# Altium PCB NANORACK_LASER_EXT..PcbDoc
Units mm, origin at the board's own origin, x right, y up, seen from the top; angles counter-clockwise.
Board outline 35.5 x 54.5 mm, 2 copper layers (Top Layer, Bottom Layer); 39 components, 23 nets, 235 pads, 95 vias.
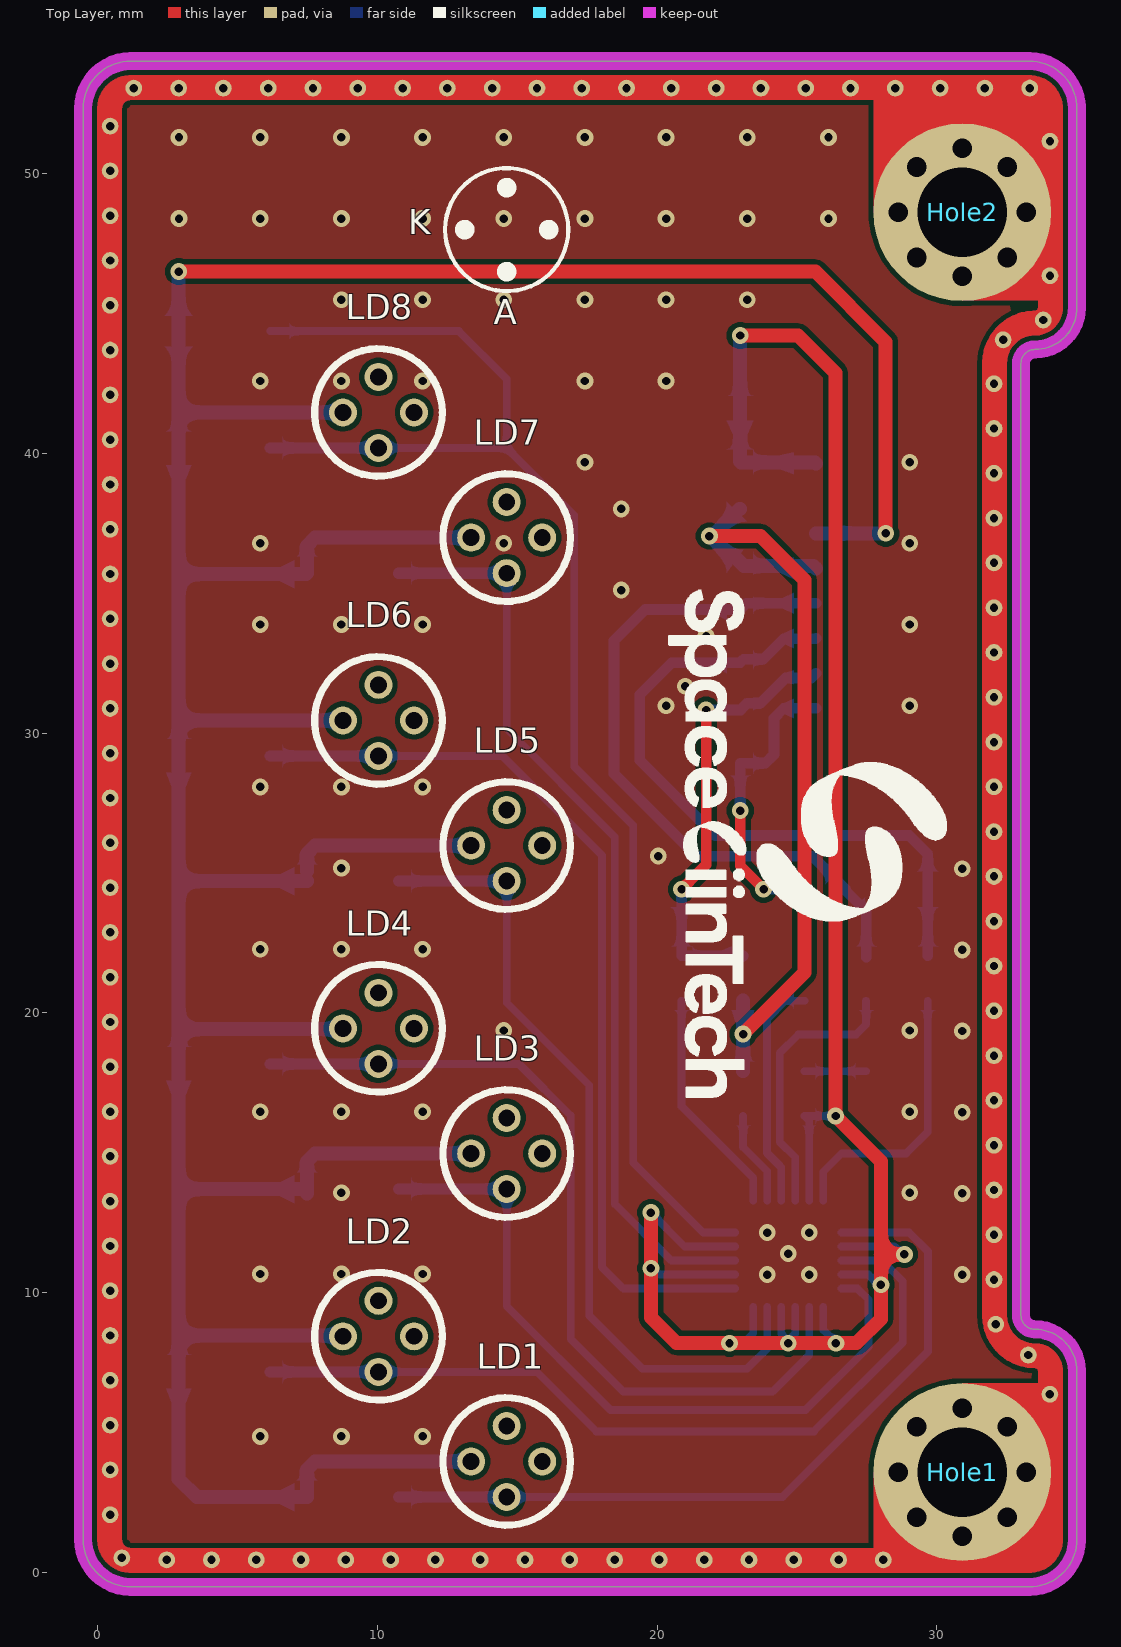
[diagram p0: Top Layer view]
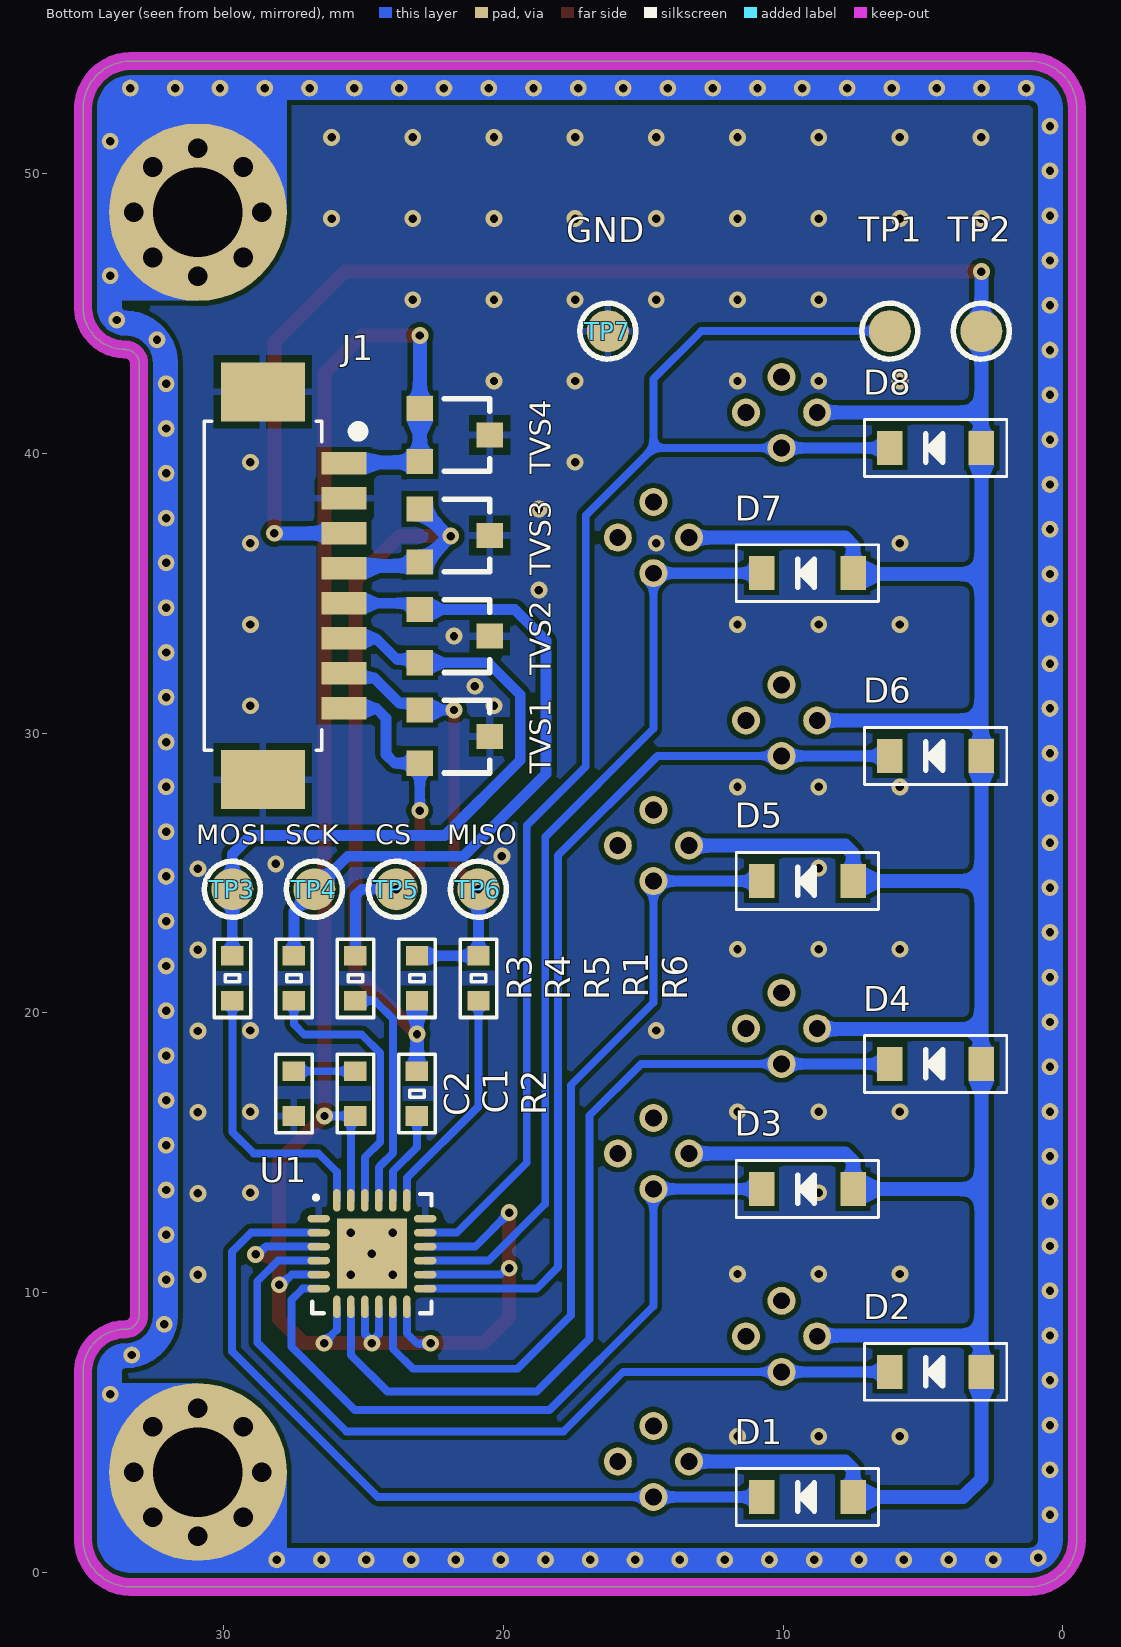
[diagram p1: Bottom Layer view, seen from below]

## Layer stack, top to bottom
Top Solder: solder mask 0.0102, Solder Resist, Dk 3.5
Top Layer: signal copper 0.0356
Dielectric 1: dielectric 0.32, FR-4, Dk 4.8
Bottom Layer: signal copper 0.0356
Bottom Solder: solder mask 0.0102, Solder Resist, Dk 3.5

## Board outline
-0.5,1.2 ccw(c1.2,1.2) 1.2,-0.5 33.3,-0.5 ccw(c33.3,1.2) 35,1.2 34.998,1.113 34.998,7.259 cw(c34.999,7.259) 34.999,7.26 35,7.2 ccw(c33.5,7.2) 33.5,8.7 cw(c33.5,9.2) 33,9.2 33,43.19 33,43.2 cw(c33.5,43.2) 33.499,43.7 33.5,43.7 ccw(c33.5,45.2) 35,45.2 35,45.176 35,52.399 ccw(c34.997,52.399) 34.997,52.402 35,52.3 ccw(c33.3,52.3) 33.3,54 1.2,54 ccw(c1.2,52.3) -0.5,52.3

## Design rules (kind name [scope] priority, off if disabled: settings)
Clearance [NOT InNet('PROTECT_EMI') and NOT OnLayer('Keep-Out Layer')] p1: gap=0.178 ignorepadtopadclearanceinfootprint=TRUE
HoleSize [All] p1: absolutevalues=TRUE maxlimit=3.2 minlimit=0.025 maxpercent=80.000 minpercent=20.000
MinimumSolderMaskSliver [All] p1: minsoldermaskwidth=0.14
PolygonConnect [All] p1: connectstyle=Relief reliefconductorwidth=0.254 reliefentries=4 polygonreliefangle="90 Angle" airgapwidth=0.254
RoutingVias [All] p1: holewidth=0.3 width=0.7 viastyle="Through Hole" minholewidth=0.3 minwidth=0.6 maxholewidth=0.711 maxwidth=1.27
SilkToSolderMaskClearance [IsPad] p1: minsilkscreentomaskgap=0.15 clearancetoexposedcopper=TRUE
SolderMaskExpansion [All] p1: expansion=0.102 istentingtop=FALSE
SupplyNets "Schematic Supply Nets_3" [InNet('12V_EXP')] p1: voltage=0.000
SupplyNets "Schematic Supply Nets_2" [InNet('+3.3')] p2: voltage=0.000
SupplyNets "Schematic Supply Nets_1" [InNet('GND')] p3: voltage=0.000
SupplyNets "Schematic Supply Nets" [InNet('I_LD_EXT')] p4: voltage=0.000
Width [All] p1: maxlimit=1.27 minlimit=0.178 preferedwidth=0.381
27 further rules are at their usual default settings.

## Classes and differential pairs
component class COMMUNICATION: Hole1 Hole2 J1 TVS1 TVS2 TVS3 TVS4
component class SWITCHING: C1 C2 D1 D2 D3 D4 D5 D6 D7 D8 LD1 LD2 LD3 LD4 LD5 LD6 LD7 LD8 q R1 R2 R3 R4 R5 R6 TP1 TP2 TP3 TP4 TP5 TP6 TP7 U1

## Components (designator, comment, footprint, x,y, rotation, side; value= is the part's Value field where it differs from the comment)
C1 "0.22uF/25V" CN-SMD-0603 25.272,17.121 r270 bottom value=33pF
C2 "0.22uF/25V" CN-SMD-0603 27.47,17.12 r90 bottom value=33pF
D1 "1N4148W-TP" SOD123 9.13,2.71 r180 bottom value=1N5007
D2 "1N4148W-TP" SOD123 4.55,7.18 r180 bottom value=1N5007
D3 "1N4148W-TP" SOD123 9.13,13.71 r180 bottom value=1N5007
D4 "1N4148W-TP" SOD123 4.55,18.18 r180 bottom value=1N5007
D5 "1N4148W-TP" SOD123 9.13,24.71 r180 bottom value=1N5007
D6 "1N4148W-TP" SOD123 4.55,29.18 r180 bottom value=1N5007
D7 "1N4148W-TP" SOD123 9.13,35.71 r180 bottom value=1N5007
D8 "1N4148W-TP" SOD123 4.55,40.18 r180 bottom value=1N5007
Hole1 "Hole" "Hole space" 30.9,3.6 r0 top locked
Hole2 "Hole" "Hole space" 30.9,48.6 r0 top locked
J1 "0532610871" 0532610871 28.579,35.26 r270 bottom
LD1 "LaserDiode" LASER_SOCKET 14.63,3.98 r90 top locked
LD2 "LaserDiode" LASER_SOCKET 10.05,8.45 r90 top locked
LD3 "LaserDiode" LASER_SOCKET 14.63,14.98 r90 top locked
LD4 "LaserDiode" LASER_SOCKET 10.05,19.45 r90 top locked
LD5 "LaserDiode" LASER_SOCKET 14.63,25.98 r90 top locked
LD6 "LaserDiode" LASER_SOCKET 10.05,30.45 r90 top locked
LD7 "LaserDiode" LASER_SOCKET 14.63,36.98 r90 top locked
LD8 "LaserDiode" LASER_SOCKET 10.05,41.45 r90 top locked
R1 "4.7K 1%" RES-SMD-0603 23.075,21.238 r90 bottom
R2 "4.7K 1%" RES-SMD-0603 23.076,17.121 r270 bottom
R3 "22R 1%" RES-SMD-0603 29.667,21.239 r270 bottom
R4 "22R 1%" RES-SMD-0603 27.47,21.239 r270 bottom
R5 "22R 1%" RES-SMD-0603 25.273,21.239 r270 bottom
R6 "22R 1%" RES-SMD-0603 20.879,21.239 r270 bottom
TP1 "Test-Point" TESTPOINT 6.185,44.354 r180 bottom
TP2 "Test-Point" TESTPOINT 2.915,44.354 r180 bottom
TP3 "Test-Point" TESTPOINT 29.667,24.418 r0 bottom
TP4 "Test-Point" TESTPOINT 26.738,24.418 r0 bottom
TP5 "Test-Point" TESTPOINT 23.808,24.418 r0 bottom
TP6 "Test-Point" TESTPOINT 20.879,24.418 r0 bottom
TP7 "Test-Point" TESTPOINT 16.256,44.354 r180 bottom
TVS1 "S2303" SOT23-123 21.721,29.87 r270 bottom
TVS2 "S2303" SOT23-123 21.721,33.462 r270 bottom
TVS3 "S2303" SOT23-123 21.721,37.054 r270 bottom
TVS4 "S2312" SOT23-123 21.721,40.645 r270 bottom
U1 "ADG1414BCPZ" ADG1414BCPZ 24.685,11.405 r180 bottom

## Footprints (in the part's own frame and the unit in brackets; to place one, negate y for a bottom-side part, rotate by r counter-clockwise, add the part's x,y. Pads: shape width x height; smd on the part's side, far side on the other; paste and mask are expansions set on the pad)
0532610871 [mm] "CONN HEADER SMD R/A 8POS 1.25MM"
  rect 0.8x1.6 smd: 1(-4.375,2.9) 2(-3.125,2.9) 3(-1.875,2.9) 4(-0.625,2.9) 5(0.625,2.9) 6(1.875,2.9) 7(3.125,2.9) 8(4.375,2.9)
  rect 2.1x3 smd: S1(-6.925,0) S2(6.925,0)
  silkscreen extent -5.87,-2.1 5.87,3.58, body extent -7.57,-1.8 7.57,3.4, height 3.2
ADG1414BCPZ [mm] "IC SW SPST-NOX8 11.5OHM 24LFCSP"
  rrect100% 0.805x0.275 smd mask+0.05: 1(-1.902,1.25) 2(-1.902,0.75) 3(-1.902,0.25) 4(-1.902,-0.25) 5(-1.902,-0.75) 6(-1.902,-1.25) 13(1.902,-1.25) 14(1.902,-0.75) 15(1.902,-0.25) 16(1.902,0.25) 17(1.902,0.75) 18(1.902,1.25)
  rrect100% 0.275x0.805 smd mask+0.05: 7(-1.25,-1.902) 8(-0.75,-1.902) 9(-0.25,-1.902) 10(0.25,-1.902) 11(0.75,-1.902) 12(1.25,-1.902) 19(1.25,1.902) 20(0.75,1.902) 21(0.25,1.902) 22(-0.25,1.902) 23(-0.75,1.902) 24(-1.25,1.902)
  rect 2.5x2.5 smd mask+0.102: HTAB(0,0)
  silkscreen extent -2.13,-2.13 2.13,2.13, body extent -2,-2 2,2, height 0.6
CN-SMD-0603 [mm]
  rect 0.7x0.8 smd: 1(-0.8,0) 2(0.8,0)
  silkscreen extent -1.4,-0.65 1.4,0.65, body extent -0.8,-0.4 0.8,0.4, height 0.3
"Hole space" [mm]
  round 1 hole 0.7: 1(-2.286,0) 1(-1.616,-1.616) 1(-1.616,1.616) 1(0,-2.286) 1(0,2.286) 1(1.616,-1.616) 1(1.616,1.616) 1(2.286,0)
  round 6.35 hole 3.2: 1(0,0)
LASER_SOCKET [mm]
  round 1 hole 0.6: 1(-1.27,0) 2(0,-1.27) 3(0,1.27) 4(1.27,0)
  silkscreen extent -2.28,-2.28 2.28,2.28, body extent -1.75,-1.75 1.75,1.75, height 7.62
RES-SMD-0603 [mm]
  rect 0.7x0.8 smd: 1(-0.8,0) 2(0.8,0)
  silkscreen extent -1.4,-0.65 1.4,0.65, body extent -0.8,-0.4 0.8,0.4, height 0.43
SOD123 [mm]
  rect 0.91x1.22 smd: 1(1.635,0) 2(-1.635,0)
  silkscreen extent -2.54,-1.02 2.54,1.02, body extent -1.85,-0.8 1.85,0.8, height 1.25
SOT23-123 [mm] "SOT23, 1=bottom-left, 2=top, 3=bottom-right"
  rect 0.9x0.95 smd: 1(-0.95,-1.25) 2(0,1.25) 3(0.95,-1.25)
  silkscreen extent -1.3,-0.38 1.3,1.25, body extent -1.52,-1.23 1.48,1.27, height 1.06
TESTPOINT [mm]
  round 1.5 smd: 1(0,0)
  silkscreen extent -1,-1 1,1

## Part data
C1 C2: library part CN, "CAP CER 0.22UF 25V X7R 0603"
D1 D2 D3 D4 D5 D6 D7 D8: library part "Diode SMD", "DIODE STANDARD 100V 150MA SOD123", Code - JEDEC=DO-214-AB, Published=8-Jun-2000, Publisher="Altium Limited", Revision="July-2002: Re-released for DXP Platform."
J1: library part "Header8 - Shield", "CONN HEADER SMD R/A 8POS 1.25MM"
LD1 LD2 LD3 LD4 LD5 LD6 LD7 LD8: library part LASER
R1 R2: library part Res-SMD, "RES SMD 4.7K OHM 1% 1/10W 0603", Manufacturer="Generic Components", Class=Passive, Published=08/06/2000, Publisher="Altium Hobart Technology Centre"
R3 R4 R5 R6: library part Res-SMD, "Resistor", Manufacturer="Generic Components", Class=Passive, Published=08/06/2000, Publisher="Altium Hobart Technology Centre"
TVS1 TVS2 TVS3: "TVS DIODE 3.3VWM 8VC SOT233"
TVS4: library part S2315, "TVS DIODE 12VWM 19VC SOT233"
U1: "IC SW SPST-NOX8 11.5OHM 24LFCSP"

## Free pads (board coordinates)
  round 0.6 hole 0.3: 1(0.464,2.078) 1(0.464,3.678) 1(0.464,5.278) 1(0.464,6.878) 1(0.464,8.478) 1(0.464,10.078) 1(0.464,11.678) 1(0.464,13.278) 1(0.464,14.878) 1(0.464,16.478) 1(0.464,18.078) 1(0.464,19.678) 1(0.464,21.278) 1(0.464,22.878) 1(0.464,24.478) 1(0.464,26.078) 1(0.464,27.678) 1(0.464,29.278) 1(0.464,30.878) 1(0.464,32.478) 1(0.464,34.078) 1(0.464,35.678) 1(0.464,37.278) 1(0.464,38.878) 1(0.464,40.478) 1(0.464,42.078) 1(0.464,43.678) 1(0.464,45.278) 1(0.464,46.878) 1(0.464,48.478) 1(0.464,50.078) 1(0.464,51.678) 1(0.886,0.535) 1(1.311,53.036) 1(2.484,0.464) 1(2.911,53.036) 1(4.084,0.464) 1(4.511,53.036) 1(5.684,0.464) 1(6.111,53.036) 1(7.284,0.464) 1(7.711,53.036) 1(8.884,0.464) 1(9.311,53.036) 1(10.484,0.464) 1(10.911,53.036) 1(12.084,0.464) 1(12.511,53.036) 1(13.684,0.464) 1(14.111,53.036) 1(15.284,0.464) 1(15.711,53.036) 1(16.884,0.464) 1(17.311,53.036) 1(18.484,0.464) 1(18.911,53.036) 1(20.084,0.464) 1(20.511,53.036) 1(21.684,0.464) 1(22.111,53.036) 1(23.284,0.464) 1(23.711,53.036) 1(24.884,0.464) 1(25.311,53.036) 1(26.484,0.464) 1(26.911,53.036) 1(28.084,0.464) 1(28.511,53.036) 1(30.111,53.036) 1(31.711,53.036) 1(32.036,10.477) 1(32.036,12.077) 1(32.036,13.677) 1(32.036,15.277) 1(32.036,16.877) 1(32.036,18.477) 1(32.036,20.077) 1(32.036,21.677) 1(32.036,23.277) 1(32.036,24.877) 1(32.036,26.477) 1(32.036,28.077) 1(32.036,29.677) 1(32.036,31.277) 1(32.036,32.877) 1(32.036,34.477) 1(32.036,36.077) 1(32.036,37.677) 1(32.036,39.277) 1(32.036,40.877) 1(32.036,42.477) 1(32.1,8.878) 1(32.362,44.043) 1(33.265,7.781) 1(33.311,53.037) 1(33.796,44.752) 1(34.033,6.378) 1(34.035,46.334) 1(34.035,51.134)

## Via types
v1: diameter 0.6, hole 0.3, Top Layer to Bottom Layer, tented both sides, 95 vias

## Nets (pads, with @x,y where several pads share a name; then routed paths per layer and width w, separated by ;. In a path a pad name is that pad's centre, name@x,y a point inside that pad or via, vN(x,y) a via of type N, cw(c..) or ccw(c..) an arc to the next point about the centre after c; other vN are vias at no path point)
12V_EXP: C1.2 J1.1 TVS4.1 TVS4.3 U1.3 U1.5 U1.7 U1.9 U1.10 U1.12 U1.14 U1.16 U1.23 | length 80.1
  Top Layer w0.5: v1(19.78,12.871) v1(19.78,10.883) 19.78,9.125 20.701,8.204 v1(24.685,8.204) v1(26.391,8.204) 27.126,8.204 27.997,9.075 v1(27.997,10.294) 27.997,11.377 ; v1(22.971,44.2) 25.043,44.2 26.377,42.866 v1(26.377,16.321) 27.997,14.7 27.997,11.377 ; v1(28.837,11.377) 27.997,11.377
  Bottom Layer w0.279: v1(19.78,10.883) 19.866,10.883 20.095,10.655 U1.14 ; v1(19.78,12.871) 20.996,11.655 U1.16 ; v1(22.588,8.204) 22.603,8.189 23.061,8.189 23.435,8.563 U1.12 ; U1.10 24.435,8.541 v1@24.685,8.291 ; v1(24.685,8.204) v1@24.685,8.291 ; U1.9 24.935,8.541 v1@24.685,8.291 ; U1.23 25.435,16.158 C1.2 v1(26.377,16.321) ; U1.7 25.935,8.681 26.391,8.225 v1(26.391,8.204) ; U1.5 27.55,10.655 27.911,10.294 v1(27.997,10.294) ; U1.3 28.473,11.655 28.75,11.377 v1(28.837,11.377)
  Bottom Layer w0.5: v1(22.971,44.2) TVS4.1 TVS4.3 23.001,39.665 25.649,39.665 J1.1
+3.3: J1.4 R1.1 R2.1 TVS3.1 TVS3.3 | length 29.5
  Top Layer w0.5: v1(21.869,37.033) 23.7,37.033 25.273,35.46 25.273,21.443 v1(23.075,19.246)
  Bottom Layer w0.5: TVS3.1 22.946,38.004 21.994,37.052 21.889,37.052 v1(21.869,37.033) 21.895,37.033 22.625,36.304 22.771,36.304 23.104,35.97 25.594,35.97 J1.4 ; R2.1 v1(23.075,19.246) R1.1@23.075,20.437
GND: C2.1 J1.2 J1.S1 J1.S2 TP7.1 TVS1.2 TVS2.2 TVS3.2 TVS4.2 U1.1 U1.18 U1.HTAB
  other v1: 5.825,4.875 8.725,4.875 11.625,4.875 23.935,10.655 25.435,10.655 30.9,10.655 5.825,10.675 8.725,10.675 11.625,10.675 24.685,11.405 23.935,12.155 25.435,12.155 30.9,13.555 8.725,13.575 29.025,13.575 30.9,16.455 5.825,16.475 8.725,16.475 11.625,16.475 29.025,16.475 30.9,19.355 14.525,19.375 29.025,19.375 30.9,22.255 5.825,22.275 8.725,22.275 11.625,22.275 8.725,25.175 30.9,25.155 28.118,25.324 20.041,25.603 5.825,28.075 8.725,28.075 11.625,28.075 20.325,30.975 29.025,30.975 21.006,31.674 21.753,33.462 5.825,33.875 8.725,33.875 11.625,33.875 29.025,33.875 18.72,35.104 5.825,36.775 14.525,36.775 29.025,36.775 18.72,38.004 17.425,39.675 29.025,39.675 5.825,42.575 8.725,42.575 11.625,42.575 17.425,42.575 20.325,42.575 8.725,45.475 11.625,45.475 14.525,45.475 17.425,45.475 20.325,45.475 23.225,45.475 2.925,48.375 5.825,48.375 8.725,48.375 11.625,48.375 14.525,48.375 17.425,48.375 20.325,48.375 23.225,48.375 26.125,48.375 2.925,51.275 5.825,51.275 8.725,51.275 11.625,51.275 14.525,51.275 17.425,51.275 20.325,51.275 23.225,51.275 26.125,51.275
I_LD_EXT: D1.1 D2.1 D3.1 D4.1 D5.1 D6.1 D7.1 D8.1 J1.3 LD1.3 LD2.3 LD3.3 LD4.3 LD5.3 LD6.3 LD7.3 LD8.3 TP2.1 | length 148.3
  Top Layer w0.5: v1(2.915,46.482) 25.654,46.482 28.169,43.967 v1(28.169,37.135)
  Bottom Layer w0.5: v1(2.915,46.482) TP2.1 2.915,41.45 ; D7.1@7.463,35.678 2.915,35.678 ; D3.1@7.495,13.555 7.495,14.687 7.788,14.98 LD3.3 ; D3.1 2.915,13.71 ; D5.1 2.915,24.71 ; D5.1@7.495,25.07 7.495,25.687 7.788,25.98 LD5.3 ; D7.1 7.495,36.687 7.788,36.98 LD7.3 ; LD6.3@8.75,30.45 2.915,30.45 ; LD2.3@8.752,8.478 2.915,8.478 ; LD4.3@8.752,19.422 2.915,19.422 ; LD8.3@8.773,41.45 2.915,41.45 ; LD1.3 7.788,3.98 7.495,3.687 D1.1 3.564,2.71 2.915,3.359 D2.1 2.915,8.478 ; J1.3 v1(28.169,37.135) ; 2.915,8.478 2.915,13.71 ; 2.915,13.71 D4.1 2.915,19.422 ; 2.915,19.422 2.915,24.71 ; 2.915,24.71 D6.1 2.915,30.45 ; 2.915,30.45 2.915,35.678 ; 2.915,35.678 D8.1 2.915,41.45
MISO_LD: J1.7 R1.2 R6.1 TP6.1 TVS1.1 | length 15.8
  Top Layer w0.381: v1(20.879,24.418) 21.753,25.292 v1(21.753,30.82)
  Bottom Layer w0.381: R6.1 R1.2 ; R6.1 v1(20.879,24.418) ; v1(21.753,30.82) TVS1.1@22.996,30.82 ; TVS1.1 23.215,31.064 23.698,31.064 24.601,31.967 25.512,31.967 J1.7
MOSI_LD: J1.6 R3.1 TP3.1 TVS2.3 | length 24.8
  Bottom Layer w0.381: J1.6 25.665,33.37 24.531,33.37 23.794,32.633 23.092,32.633 TVS2.3 20.523,32.512 19.38,31.369 19.38,29.032 22.073,26.34 29.007,26.34 29.667,25.679 29.667,24.017 R3.1
NetC1_1: C1.1 C2.2 | length 2.2
  Bottom Layer w0.279: C1.1@25.273,17.92 C2.2@27.469,17.92
NetD1_2: D1.2 LD1.1 U1.2 | length 28
  Bottom Layer w0.279: LD1.1 24.478,2.71 29.679,7.911 29.679,11.481 29.005,12.155 U1.2
  Bottom Layer w0.4: D1.2 LD1.1
NetD2_2: D2.2 LD2.1 U1.4 | length 29.5
  Bottom Layer w0.279: LD2.1 15.705,7.18 17.831,5.055 25.603,5.055 28.778,8.23 28.778,10.414 28.038,11.155 U1.4
  Bottom Layer w0.4: D2.2 LD2.1
NetD3_2: D3.2 LD3.1 U1.6 | length 26.3
  Bottom Layer w0.279: LD3.1 14.63,9.525 18.339,5.817 25.298,5.817 27.559,8.077 27.559,9.754 27.158,10.155 U1.6
  Bottom Layer w0.4: D3.2 LD3.1
NetD4_2: D4.2 LD4.1 U1.8 | length 31
  Bottom Layer w0.279: LD4.1 15.069,18.18 16.916,16.332 16.916,8.357 18.796,6.477 24.13,6.477 25.435,7.782 U1.8
  Bottom Layer w0.4: D4.2 LD4.1
NetD5_2: D5.2 LD5.1 U1.11 | length 29.5
  Bottom Layer w0.279: LD5.1 14.63,20.365 17.577,17.418 17.577,9.195 19.482,7.29 23.216,7.29 23.935,8.009 U1.11
  Bottom Layer w0.4: D5.2 LD5.1
NetD6_2: D6.2 LD6.1 U1.13 | length 33.1
  Bottom Layer w0.279: LD6.1 14.483,29.18 18.034,25.628 18.034,10.922 18.801,10.155 U1.13
  Bottom Layer w0.4: D6.2 LD6.1
NetD7_2: D7.2 LD7.1 U1.15 | length 33.1
  Bottom Layer w0.279: LD7.1 14.63,30.15 18.492,26.288 18.492,13.182 20.519,11.155 U1.15
  Bottom Layer w0.4: D7.2 LD7.1
NetD8_2: D8.2 LD8.1 TP1.1 U1.17 | length 52.1
  Bottom Layer w0.279: TP1.1 12.923,44.354 14.63,42.647 14.63,40.18 ; LD8.1 14.63,40.18 ; U1.17 21.653,12.155 19.152,14.656 19.152,26.695 17.043,28.804 17.043,37.767 14.63,40.18
  Bottom Layer w0.4: D8.2 LD8.1
NetR2_2: R2.2 U1.20 | length 3.4
  Bottom Layer w0.279: R2.2 23.076,15.202 23.935,14.343 U1.20
NetR3_2: R3.2 U1.24 | length 10
  Bottom Layer w0.279: U1.24 25.935,14.326 26.596,14.986 28.905,14.986 29.667,15.748 R3.2
NetR4_2: R4.2 U1.22 | length 9.8
  Bottom Layer w0.279: U1.22 24.935,14.841 24.384,15.392 24.384,18.568 25.044,19.228 27.102,19.228 27.47,19.596 R4.2
NetR5_2: R5.2 U1.21 | length 8.3
  Bottom Layer w0.279: U1.21 24.435,14.478 24.393,14.52 24.393,14.532 23.927,14.998 23.927,19.787 24.579,20.439 R5.2
NetR6_2: R6.2 U1.19 | length 8.2
  Bottom Layer w0.279: R6.2 20.879,16.662 23.435,14.106 U1.19
PROTECT_EMI: Hole1.1 Hole2.1 pad.1 | length 346.7
  Top Layer w0.889: 32.056,43.19 32.056,9.2 ccw(c33.5,9.2) 33.5,7.756 cw(c33.5,7.2) 34.053,7.249 34.053,1.142 cw(c33.3,1.2) 33.3,0.445 1.2,0.445 cw(c1.2,1.2) 0.445,1.2 0.445,52.3 cw(c1.2,52.3) 1.2,53.056 33.3,53.056 cw(c33.3,52.3) 34.053,52.358 ; 32.056,43.204 cw(c33.5,43.2) 33.497,44.644 ; 33.501,44.644 ccw(c33.5,45.2) 34.053,45.144 ; 34.052,45.176 cw(c34.997,45.176) 34.055,45.252 34.055,52.316
  Bottom Layer w0.889: 32.056,43.19 32.056,9.2 ccw(c33.5,9.2) 33.5,7.756 cw(c33.5,7.2) 34.053,7.249 34.053,1.142 cw(c33.3,1.2) 33.3,0.445 1.2,0.445 cw(c1.2,1.2) 0.445,1.2 0.445,52.3 cw(c1.2,52.3) 1.2,53.056 33.3,53.056 cw(c33.3,52.3) 34.053,52.358 ; 32.056,43.204 cw(c33.5,43.2) 33.497,44.644 ; 33.501,44.644 ccw(c33.5,45.2) 34.053,45.144 ; 34.052,45.176 cw(c34.997,45.176) 34.055,45.252 34.055,52.316
SCK_LD: J1.5 R4.1 TP4.1 TVS2.1 | length 25.2
  Bottom Layer w0.381: J1.5 23.194,34.635 TVS2.1 19.578,34.412 18.466,33.299 18.466,28.55 21.412,25.603 25.552,25.603 TP4.1 26.738,24.368 27.47,23.635 R4.1@27.47,21.988
SW_EXT_CS: J1.8 R5.1 TP5.1 TVS1.3 | length 12.8
  Top Layer w0.381: v1(22.971,27.229) 22.971,25.255 v1(23.808,24.418)
  Bottom Layer w0.381: v1(22.971,27.229) TVS1.3 23.866,28.92 24.181,29.235 24.181,30.531 24.531,30.881 25.676,30.881 J1.8 ; v1(23.808,24.418) 25.05,24.418 25.273,24.195 R5.1
pads on no net: LD1.2 LD1.4 LD2.2 LD2.4 LD3.2 LD3.4 LD4.2 LD4.4 LD5.2 LD5.4 LD6.2 LD6.4 LD7.2 LD7.4 LD8.2 LD8.4

## Polygon pours and split planes (outlines as drawn)
GND on Top Layer "GND_L01_P000" (solid, pour order 0): -0.5,1.2 ccw(c1.2,1.2) 1.2,-0.5 33.3,-0.5 ccw(c33.3,1.2) 35,1.2 34.998,1.113 34.998,7.259 cw(c34.999,7.259) 34.999,7.26 35,7.2 ccw(c33.5,7.2) 33.5,8.7 cw(c33.5,9.2) 33,9.2 33,43.19 33,43.2 cw(c33.5,43.2) 33.499,43.7 33.5,43.7 ccw(c33.5,45.2) 35,45.2 35,45.176 35,52.399 ccw(c34.997,52.399) 34.997,52.402 35,52.3 ccw(c33.3,52.3) 33.3,54 1.2,54 ccw(c1.2,52.3) -0.5,52.3
GND on Bottom Layer "GND_L02_P001" (solid, pour order 1): -0.5,1.2 ccw(c1.2,1.2) 1.2,-0.5 33.3,-0.5 ccw(c33.3,1.2) 35,1.2 34.998,1.113 34.998,7.259 cw(c34.999,7.259) 34.999,7.26 35,7.2 ccw(c33.5,7.2) 33.5,8.7 cw(c33.5,9.2) 33,9.2 33,43.19 33,43.2 cw(c33.5,43.2) 33.499,43.7 33.5,43.7 ccw(c33.5,45.2) 35,45.2 35,45.176 35,52.399 ccw(c34.997,52.399) 34.997,52.402 35,52.3 ccw(c33.3,52.3) 33.3,54 1.2,54 ccw(c1.2,52.3) -0.5,52.3

## Keep-outs
Keep-Out Layer:
  lines w0.644: 33,43.19 33,9.2 ccw(c33.5,9.2) 33.5,8.7 cw(c33.5,7.2) 35,7.2 ; 33,43.2 cw(c33.5,43.2) 33.499,43.7 ; 33.5,43.7 ccw(c33.5,45.2) 35,45.2 ; 34.997,45.176 ccw(c35,45.176) 35,45.173 ; 34.997,52.402 cw(c34.997,52.399) 35,52.399 35,45.176 ; 34.997,52.405 cw(c34.997,52.402) 35,52.402 ; 34.998,1.113 34.998,7.259 cw(c34.999,7.259) 34.999,7.26 ; 35,1.2 cw(c33.3,1.2) 33.3,-0.5 1.2,-0.5 cw(c1.2,1.2) -0.5,1.2 -0.5,52.3 cw(c1.2,52.3) 1.2,54 33.3,54 cw(c33.3,52.3) 35,52.3

## Other copper
Top Layer:
  rectangle net PROTECT_EMI: 30.9,45.441 34.055,48.6
  rectangle net PROTECT_EMI: 27.725,48.6 34.055,53.056
  rectangle net PROTECT_EMI: 27.725,0.445 30.9,3.6
  rectangle net PROTECT_EMI: 30.9,0.445 34.053,6.775
Bottom Layer:
  rectangle net PROTECT_EMI: 27.725,0.445 30.9,3.6
  rectangle net PROTECT_EMI: 30.9,0.445 34.053,6.775
  rectangle net PROTECT_EMI: 30.9,45.441 34.055,48.6
  rectangle net PROTECT_EMI: 27.725,48.6 34.055,53.056

## Silkscreen, mask and mechanical layers (free items; w line width, h text height)
Top Overlay:
  drawing of 22 lines, arcs and shapes, not listed
  text "K" at 11.105,47.505 h1.52
  text "A" at 14.162,44.289 h1.52
Bottom Overlay:
  text "GND" at 17.745,47.223 h1.52
  text "MISO" at 21.996,25.794 h1.2
  text "CS" at 24.562,25.794 h1.2
  text "SCK" at 27.788,25.794 h1.2
  text "MOSI" at 30.963,25.794 h1.2

## Text inside footprints (layer, text, board x,y; h text height)
U1: Mechanical 13 "*" at 26.118,12.496 h0.64 r270